# Altium PCB 400148.PcbDoc
Units mm, origin at the board's own origin, x right, y up, seen from the top; angles counter-clockwise.
Board outline 21.15 x 58.93 mm, 2 copper layers (Top Layer, Bottom Layer), stack 0.121 mm thick; 2 components, 1 nets, 0 pads, 2 vias.
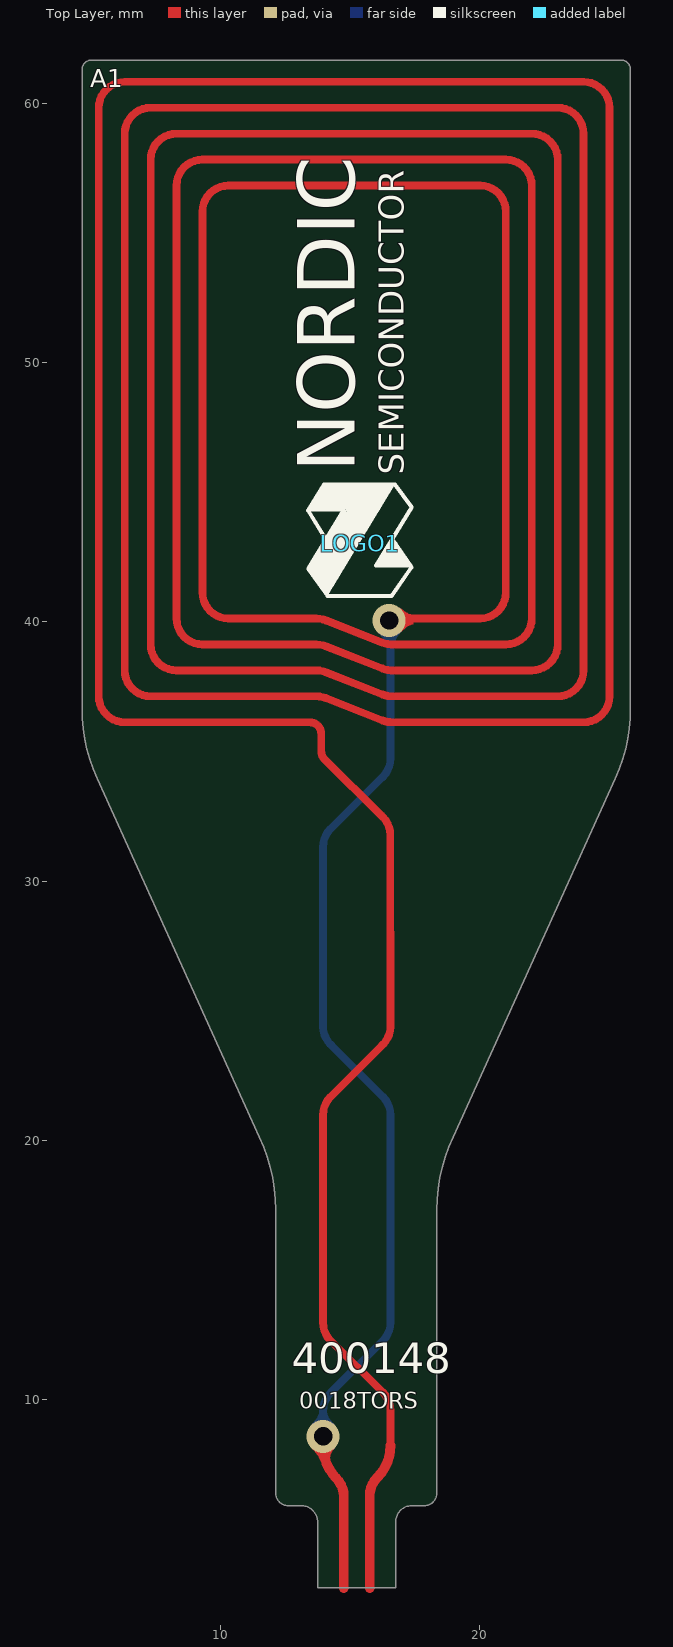
[diagram p0: Top Layer view]
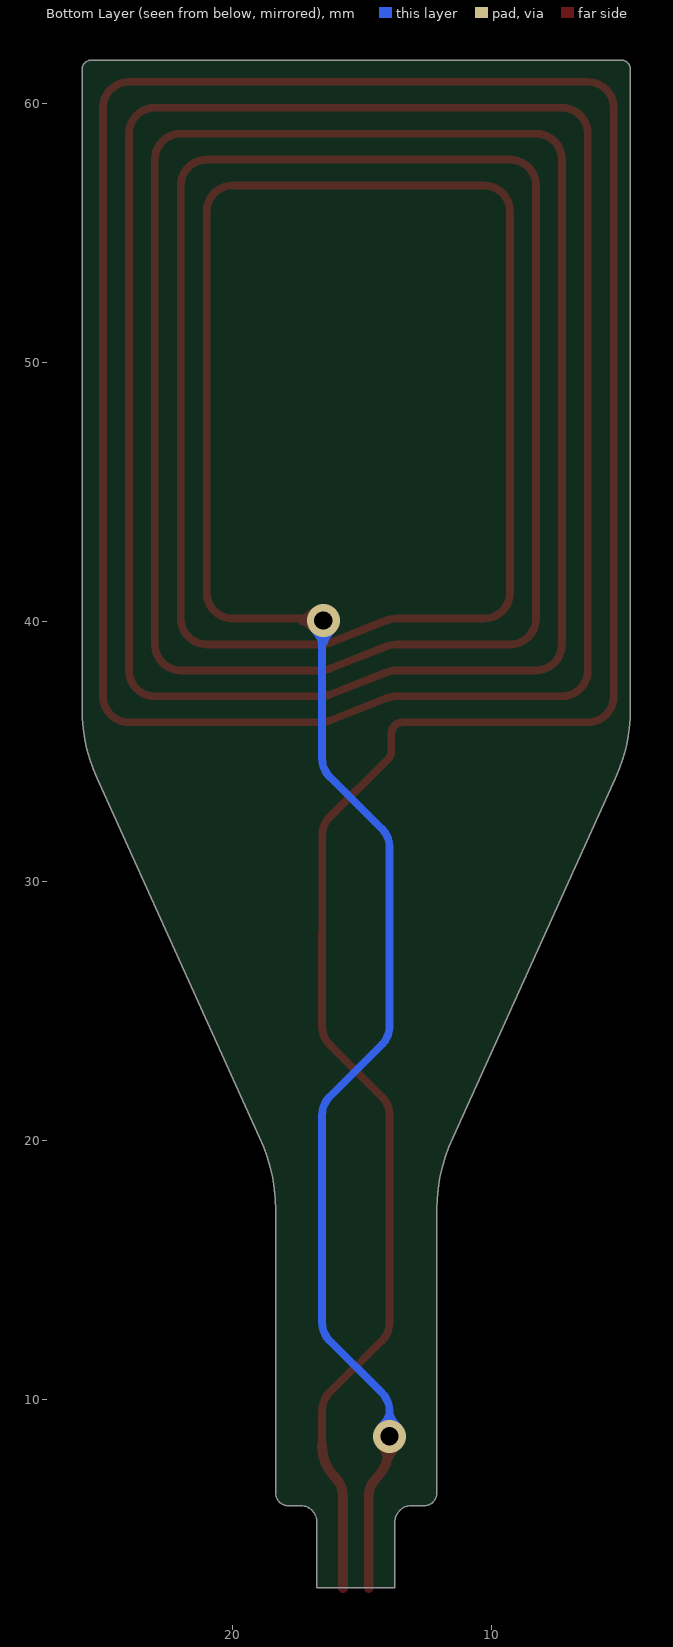
[diagram p1: Bottom Layer view, seen from below]

## Layer stack, top to bottom
Top Solder: solder mask 0.0102, Solder Resist, Dk 3.5
Top Layer: signal copper 0.0356
Dielectric1: core 0.05, FR-4, Dk 4.8
Bottom Layer: signal copper 0.0356
Bottom Solder: solder mask 0.0102, Solder Resist, Dk 3.5

## Board outline
12.632,5.918 cw(c12.606,6.401) 12.123,6.401 12.124,6.401 12.124,17.323 ccw(c5.673,17.349) 11.494,20.129 5.249,33.968 5.247,33.967 cw(c10.877,36.614) 4.656,36.678 4.656,61.29 cw(c5.025,61.303) 5.012,61.671 25.451,61.671 cw(c25.438,61.303) 25.806,61.29 25.806,36.678 cw(c19.586,36.614) 25.216,33.967 25.214,33.968 18.968,20.129 18.969,20.129 ccw(c24.79,17.349) 18.339,17.323 18.339,6.401 cw(c17.856,6.401) 17.831,5.918 17.399,5.918 ccw(c17.39,5.275) 16.747,5.283 16.747,2.743 13.741,2.743 13.741,5.283 ccw(c13.098,5.275) 13.089,5.918

## Design rules (kind name [scope] priority, off if disabled: settings)
Clearance ANT_Clerance [InNet('ANT')] p1: gap=0.127
Clearance Polygon_Clearance [(InNamedPolygon('Top_Layer-GND')) or (InNamedPolygon('Bottom_Layer-GND'))] p2: gap=0.254
Clearance [All] p3: gap=0.152
ComponentClearance [All] p1 off: gap=0.254 collisioncheckmode=3 verticalgap=0.254 showdistances=FALSE
DiffPairsRouting [All] p1: maxlimit=0.15 minlimit=0.15 mostfreqgap=0.15 toplayer_minwidth=0.381 toplayer_maxwidth=0.381 toplayer_prefwidth=0.381 bottomlayer_minwidth=0.381 bottomlayer_maxwidth=0.381 bottomlayer_prefwidth=0.381 maxuncoupledlength=12.7
FabricationTestPointUsage TestPointUsage [All] p1: valid=0 allowmultiple=FALSE
FabricationTestpoint Testpoint [All] p1: side=3 testpointundercomponent=TRUE minsize=1.016 maxsize=2.54 preferedsize=1.524 minholesize=0 maxholesize=1.016 preferedholesize=0.813 testpointgrid=0.025 allowsidetop=TRUE allowsidebottom=TRUE usegrid=TRUE gridtolerance=0
Height [All] p1 off: minheight=0 maxheight=25.4 prefheight=12.7
HoleSize [All] p1: absolutevalues=TRUE maxlimit=5 minlimit=0.305 maxpercent=80.000 minpercent=20.000
MinimumAnnularRing [All] p1 off: minimumring=0.152
PolygonConnect PolygonConnect_1 [isVia and innet(gnd)] p1: connectstyle=Direct reliefconductorwidth=0.254 reliefentries=4 polygonreliefangle="90 Angle" airgapwidth=0.254
PolygonConnect [All] p2: connectstyle=Relief reliefconductorwidth=0.254 reliefentries=4 polygonreliefangle="90 Angle" airgapwidth=0.254
RoutingVias [All] p1: holewidth=0.305 width=0.61 viastyle="Through Hole" minholewidth=0.305 minwidth=0.61 maxholewidth=0.711 maxwidth=1.27
ShortCircuit ShortCircuit_1 [All] p1: allowed=FALSE
ShortCircuit [InNet('N') vs InNet('P')] p2: allowed=TRUE
SilkToSolderMaskClearance SilkscreenOverComponentPads [IsPad] p1: minsilkscreentomaskgap=0.254 clearancetoexposedcopper=TRUE
SolderMaskExpansion [All] p1: expansion=0.076
Width [All] p1: maxlimit=2.54 minlimit=0.152 preferedwidth=0.152
22 further rules are at their usual default settings.

## Components (designator, comment, footprint, x,y, rotation, side; value= is the part's Value field where it differs from the comment)
A1 "NFC_ANT_Listener-6" NFC_ANT_Listener-6 13.945,4.902 r90 top
LOGO1 "Nordic Logo M" NORDIC_LOGO_M 15.39,43.036 r90 top

## Footprints (in the part's own frame and the unit in brackets; to place one, negate y for a bottom-side part, rotate by r counter-clockwise, add the part's x,y. Pads: shape width x height; smd on the part's side, far side on the other; paste and mask are expansions set on the pad)
NFC_ANT_Listener-6 [mm]
  Top Layer lines w0.3: 51.93,5.644 cw(c51.93,4.644) 52.93,4.644 52.93,-7.056 cw(c51.93,-7.056) 51.93,-8.056 35.23,-8.056 cw(c35.23,-7.056) 34.23,-7.056 34.23,-2.665 34.23,-2.639 34.235,-2.569 34.244,-2.5 34.258,-2.432 34.276,-2.365 34.3,-2.299 35.161,-0.112 ; 51.93,5.644 35.23,5.644 ccw(c35.23,4.644) 34.23,4.644 34.23,0.254 cw(c33.23,0.254) 34.157,-0.12 ; 51.93,3.644 ccw(c50.93,3.644) 50.93,4.644 36.23,4.644 ccw(c36.23,3.644) 35.23,3.644 35.23,0.254 cw(c34.23,0.254) 35.157,-0.12 ; 51.93,3.644 51.93,-6.056 cw(c50.93,-6.056) 50.93,-7.056 36.23,-7.056 cw(c36.23,-6.056) 35.23,-6.056 35.23,-2.606 ; 32.161,-0.112 31.3,-2.299 31.276,-2.365 31.258,-2.432 31.244,-2.5 31.235,-2.569 31.23,-2.639 31.23,-2.665 31.23,-10.056 ccw(c32.23,-10.056) 32.23,-11.056 54.93,-11.056 ccw(c54.93,-10.056) 55.93,-10.056 55.93,7.644 ccw(c54.93,7.645) 54.93,8.644 32.23,8.644 ccw(c32.23,7.645) 31.23,7.645 31.23,7.594 31.23,0.514 cw(c30.78,0.514) 30.78,0.064 30.684,0.064 30.139,0.064 30.124,0.064 ccw(c30.124,-0.4) 29.796,-0.072 27.63,-2.256 27.575,-2.31 cw(c26.874,-1.61) 26.874,-2.601 19.48,-2.606 cw(c19.48,-1.674) 18.822,-2.333 18.773,-2.284 16.787,-0.298 ccw(c16.08,-1.005) 16.08,-0.006 ; 33.161,-0.112 32.3,-2.299 32.276,-2.365 32.258,-2.432 32.244,-2.5 32.235,-2.569 32.23,-2.639 32.23,-2.665 32.23,-9.056 ccw(c33.23,-9.056) 33.23,-10.056 ; 34.161,-0.112 33.3,-2.299 33.276,-2.365 33.258,-2.432 33.244,-2.5 33.235,-2.569 33.23,-2.639 33.23,-2.665 33.23,-8.056 ccw(c34.23,-8.056) 34.23,-9.056 52.93,-9.056 ccw(c52.93,-8.056) 53.93,-8.056 53.93,5.644 ccw(c52.93,5.644) 52.93,6.644 34.23,6.644 ccw(c34.23,5.644) 33.23,5.644 33.23,0.254 cw(c32.23,0.254) 33.157,-0.12 ; 32.157,-0.12 ccw(c31.23,0.254) 32.23,0.254 32.23,6.644 cw(c33.23,6.644) 33.23,7.644 53.93,7.644 ; 4.68,-2.606 ccw(c4.68,-1.606) 5.387,-2.313 7.373,-0.298 cw(c8.08,-1.005) 8.08,-0.006 16.08,-0.006 ; 53.93,7.644 cw(c53.93,6.644) 54.93,6.644 54.93,-9.056 cw(c53.93,-9.056) 53.93,-10.056 33.23,-10.056 ; 53.93,7.644 53.93,7.644 ; 16.08,-0.006 16.08,-0.006 ; 33.23,-10.056 33.23,-10.056
  Bottom Layer lines w0.3: 3.68,-0.006 3.683,-0.006 4.652,-0.006 ; 4.656,-0.006 cw(c4.656,-1.03) 5.38,-0.306 7.373,-2.313 ccw(c8.08,-1.606) 8.08,-2.606 ; 35.23,-2.606 29.83,-2.606 cw(c29.83,-1.606) 29.123,-2.313 27.123,-0.299 ccw(c26.416,-1.006) 26.416,-0.006 ; 26.416,-0.006 26.416,-0.006 ; 26.416,-0.006 19.48,-0.006 ccw(c19.48,-0.937) 18.822,-0.278 18.773,-0.327 16.787,-2.313 cw(c16.08,-1.606) 16.08,-2.606 8.08,-2.606 ; 8.08,-2.606 8.08,-2.606
NORDIC_LOGO_M [mm] "Medium Nordic Logo"
  silkscreen extent -2.03,-1.98 2.28,2.02

## Part data
A1: "NFC Antenna Listener-6"
LOGO1: "Nordic Logo, medium size"

## Via types
v1: diameter 1.27, hole 0.711, Top Layer to Bottom Layer, tented both sides, 2 vias

## Nets (pads, with @x,y where several pads share a name; then routed paths per layer and width w, separated by ;. In a path a pad name is that pad's centre, name@x,y a point inside that pad or via, vN(x,y) a via of type N, cw(c..) or ccw(c..) an arc to the next point about the centre after c; other vN are vias at no path point)
ANT:  | length 13.1
  Top Layer w0.3: 16.55,9.583 16.55,8.238 16.553,8.236
  Top Layer w0.381: v1(13.95,8.585) 13.95,8.21 ccw(c15.695,8.21) 14.461,6.976 cw(c13.765,6.281) 14.749,6.281 14.749,2.743 ; 15.749,2.743 15.749,6.272 ; 15.754,6.306 cw(c16.738,6.306) 16.042,7.002 ccw(c14.808,8.236) 16.553,8.236
  other v1: 16.499,40.056

## Polygon pours and split planes (outlines as drawn)
no net on Mechanical 5 (hatched Horizontal grid 0.025 track 0.025): 16.734,2.756 13.754,2.756 13.754,5.283 13.754,5.284 13.743,5.397 13.712,5.506 13.664,5.608 13.598,5.7 13.517,5.78 13.424,5.845 13.321,5.892 13.212,5.921 13.099,5.931 12.623,5.931 12.615,5.929 12.608,5.931 12.516,5.94 12.427,5.966 12.346,6.009 12.275,6.068 12.216,6.139 12.172,6.22 12.145,6.308 12.136,6.401 12.136,7.491 18.326,7.491 18.326,6.402 18.318,6.311 18.292,6.224 18.249,6.143 18.192,6.072 18.123,6.013 18.043,5.969 17.956,5.941 17.865,5.93 17.863,5.93 17.857,5.931 17.391,5.931 17.278,5.921 17.168,5.892 17.065,5.845 16.972,5.78 16.891,5.7 16.825,5.608 16.776,5.506 16.745,5.396 16.734,5.284
no net on Mechanical 6 (hatched Horizontal grid 0.025 track 0.025): 16.734,2.756 13.754,2.756 13.754,5.283 13.754,5.284 13.743,5.397 13.712,5.506 13.664,5.608 13.598,5.7 13.517,5.78 13.424,5.845 13.321,5.892 13.212,5.921 13.099,5.931 12.623,5.931 12.615,5.929 12.608,5.931 12.516,5.94 12.427,5.966 12.346,6.009 12.275,6.068 12.216,6.139 12.172,6.22 12.145,6.308 12.136,6.401 12.136,7.491 18.326,7.491 18.326,6.402 18.318,6.311 18.292,6.224 18.249,6.143 18.192,6.072 18.123,6.013 18.043,5.969 17.956,5.941 17.865,5.93 17.863,5.93 17.857,5.931 17.391,5.931 17.278,5.921 17.168,5.892 17.065,5.845 16.972,5.78 16.891,5.7 16.825,5.608 16.776,5.506 16.745,5.396 16.734,5.284

## Silkscreen, mask and mechanical layers (free items; w line width, h text height)
Top Overlay:
  text "NORDIC" at 15.9,45.771 h3.81 r90
  text "SEMICONDUCTOR" at 17.391,45.685 h1.65 r90
  text "400148" at 12.751,10.617 h2.03
  text "0018TORS" at 13.03,9.652 h0.64
Top Solder:
  lines w0.35: 14.249,2.743 14.249,6.243 ; 14.749,2.743 14.749,6.243 ; 15.249,2.743 15.249,6.243 ; 15.749,2.743 15.749,6.243 ; 16.249,2.743 16.249,6.243
Mechanical 1:
  lines w0.152: 5.247,33.967 cw(c10.877,36.614) 4.656,36.678 4.656,61.29 cw(c5.025,61.303) 5.012,61.671 25.451,61.671 cw(c25.438,61.303) 25.806,61.29 25.806,36.678 cw(c19.586,36.614) 25.216,33.967 ; 5.249,33.968 11.494,20.129 ; 11.494,20.129 cw(c5.673,17.349) 12.124,17.323 12.124,6.401 ccw(c12.606,6.401) 12.632,5.918 13.089,5.918 cw(c13.098,5.275) 13.741,5.283 13.741,2.743 16.747,2.743 16.747,5.283 cw(c17.39,5.275) 17.399,5.918 17.831,5.918 ccw(c17.856,6.401) 18.339,6.401 ; 18.339,6.401 18.339,17.323 cw(c24.79,17.349) 18.969,20.129 25.214,33.968
Mechanical 4:
  lines w0.1: 18.339,6.401 cw(c17.856,6.401) 17.831,5.918 17.399,5.918 ccw(c17.39,5.275) 16.747,5.283 16.747,2.743 13.741,2.743 13.741,5.283 ccw(c13.098,5.275) 13.089,5.918 12.632,5.918 cw(c12.606,6.401) 12.123,6.401 12.123,7.533 18.346,7.533 18.346,6.401
  text "STIFFENER BOTTOM SIDE. / TOTAL THICKNESS @ STIFFENER: 0.3 MM." at 18.7,2.9 h2.5
Mechanical 5:
  lines w0.75: 14.75,2.743 14.75,6.243 ; 15.751,2.743 15.751,6.243
  text "COVER LAYER FOR FLEX ON TOP SIDE" at 18.7,3.306 h2.5
Mechanical 6:
  text "COVER LAYER FOR FLEX ON BOTTOM SIDE" at 18.7,3.306 h2.5